# EAGLE board Board_v1_3 (EAGLE 9.6.2)
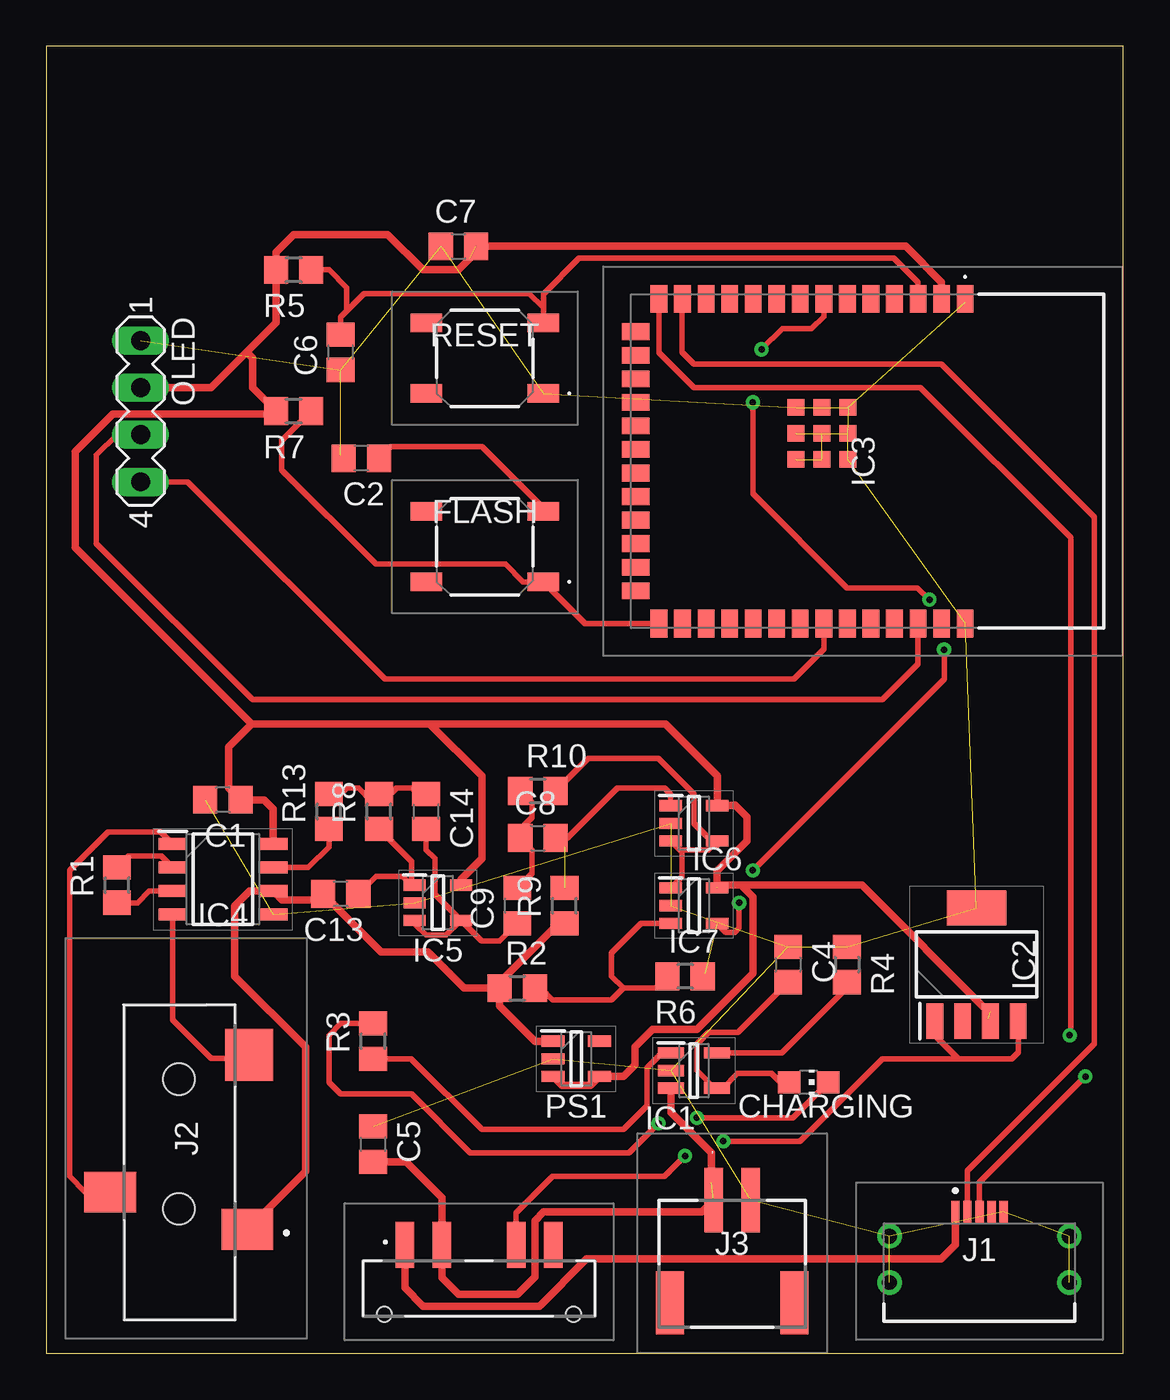
[diagram p0: board, top side]
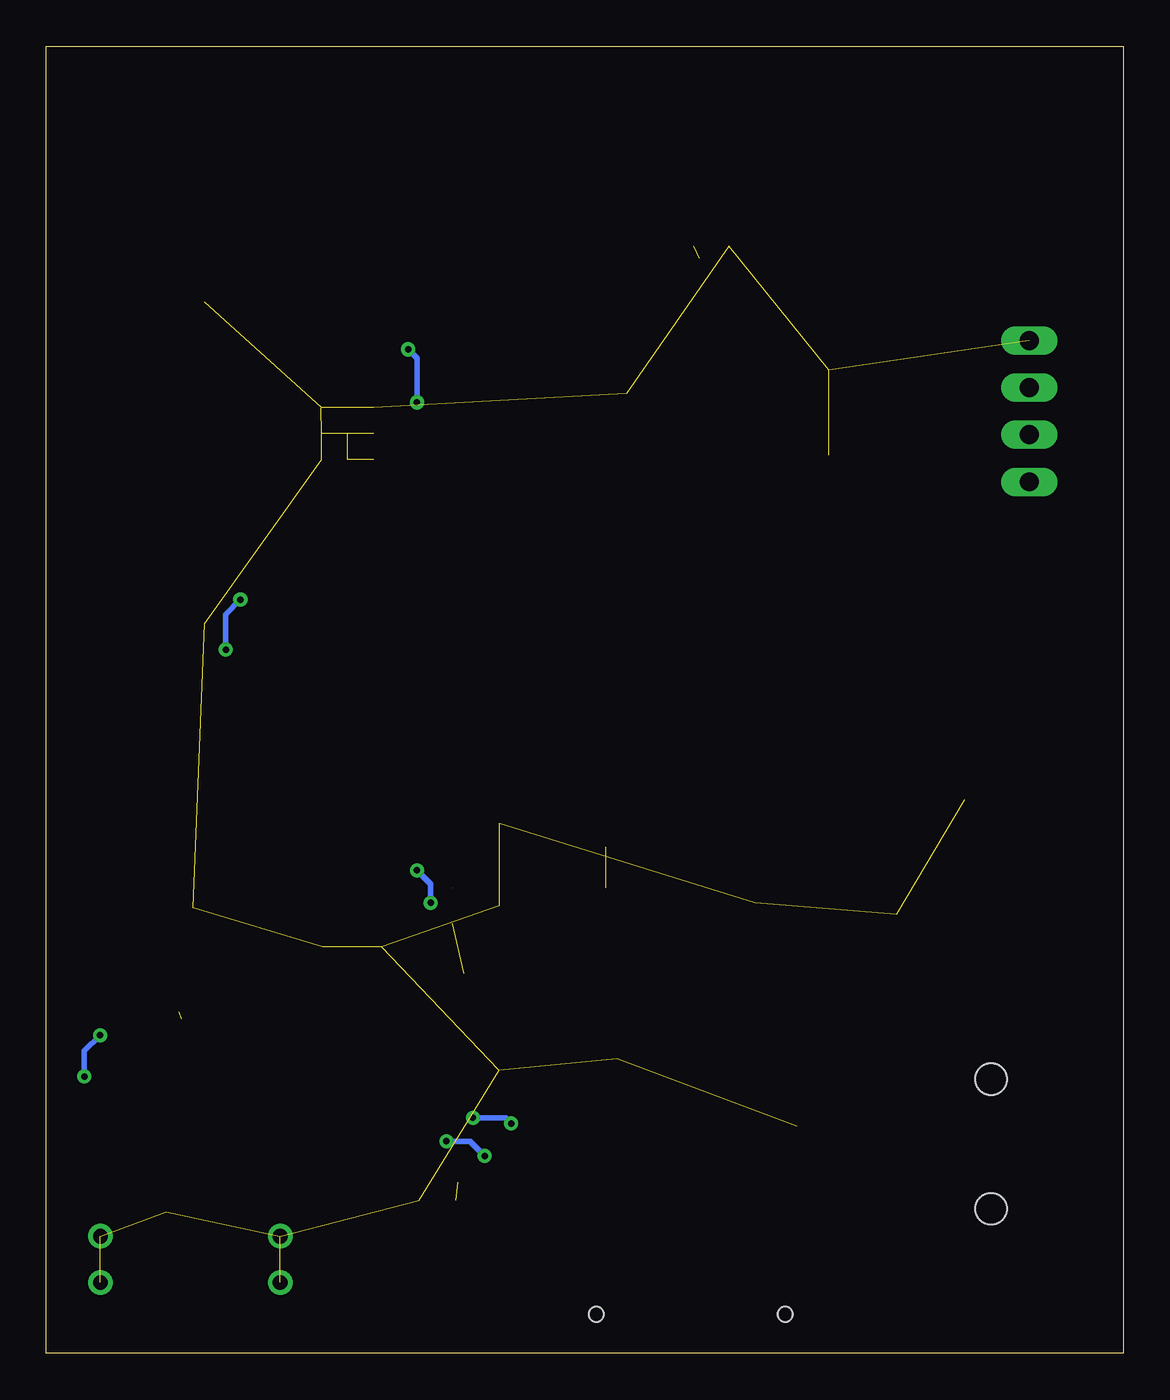
[diagram p1: board, bottom side, seen from below]

Size 58.09 x 70.47 mm. Coordinates in mm from the lower left corner, seen from the top.
Outline: 0,0 58.09,0 58.09,70.47 0,70.47 0,0
Copper layers (1*16): Top 0.035mm / dielectric 1.5mm / Bottom 0.035mm
Design rules "default": minimum track width 6mil, minimum drill 0.35mm, track to track 6mil, track to pad 6mil, pad to pad 6mil, via to via 6mil, smd to smd 6mil, copper to edge 40mil, drill to drill 6mil, minimum pad ring 10mil, minimum via ring 8mil, stop-mask expansion 4mil, vias tented up to drill 0mil, thermal gap 10mil

## Footprints (pad centres in the part's own frame; a part is rotated, then mirrored left to right if it is on the bottom)
C0805 = smd 1.3 x 1.5: 1 -0.95,0; 2 0.95,0
CHIP-LED0805 = smd 1.2 x 1.2: A 0,-1.05; C 0,1.05
TS18517SL160SMTTR = smd 1.7 x 1: 1 -3.15,1.9; 2 3.15,1.9; 3 -3.15,-1.9; 4 3.15,-1.9
SOT95P270X145-5N = smd 1.4 x 0.6: 1 -1.25,0.95; 2 -1.25,0; 3 -1.25,-0.95; 4 1.25,-0.95; 5 1.25,0.95
SOT150P700X180-5N = smd 1.9 x 0.9: 1 -3.05,2.25; 2 -3.05,0.75; 3 -3.05,-0.75; 4 -3.05,-2.25 | smd 1.9 x 3.2: 5 3.05,0
ESP32S3WROOM1N16R8 = smd 1.5 x 0.9: 1 -8.75,5.26; 2 -8.75,3.99; 3 -8.75,2.72; 4 -8.75,1.45; 5 -8.75,0.18; 6 -8.75,-1.09; 7 -8.75,-2.36; 8 -8.75,-3.63; 9 -8.75,-4.9; 10 -8.75,-6.17; 11 -8.75,-7.44; 12 -8.75,-8.71; 13 -8.75,-9.98; 14 -8.75,-11.25; 27 8.75,-11.25; 28 8.75,-9.98; 29 8.75,-8.71; 30 8.75,-7.44; 31 8.75,-6.17; 32 8.75,-4.9; 33 8.75,-3.63; 34 8.75,-2.36; 35 8.75,-1.09; 36 8.75,0.18; 37 8.75,1.45; 38 8.75,2.72; 39 8.75,3.99; 40 8.75,5.26 | smd 0.9 x 1.5: 15 -6.985,-12.5; 16 -5.715,-12.5; 17 -4.445,-12.5; 18 -3.175,-12.5; 19 -1.905,-12.5; 20 -0.635,-12.5; 21 0.635,-12.5; 22 1.905,-12.5; 23 3.175,-12.5; 24 4.445,-12.5; 25 5.715,-12.5; 26 6.985,-12.5 | smd 0.9 x 0.9: 41 -1.5,-2.46; 42 -2.9,-1.06; 43 -2.9,-2.46; 44 -2.9,-3.86; 45 -1.5,-3.86; 46 -0.1,-3.86; 47 -0.1,-2.46; 48 -0.1,-1.06; 49 -1.5,-1.06
SOIC127P600X175-8N = smd 1.525 x 0.65: 1 -2.712,1.905; 2 -2.712,0.635; 3 -2.712,-0.635; 4 -2.712,-1.905; 5 2.712,-1.905; 6 2.712,-0.635; 7 2.712,0.635; 8 2.712,1.905
SOT95P280X145-5N = smd 1.2 x 0.6: 1 -1.25,0.95; 2 -1.25,0; 3 -1.25,-0.95; 4 1.25,-0.95; 5 1.25,0.95
USB350030AKIT = smd 0.45 x 1.2: 1 -1.3,3.8; 2 -0.65,3.8; 3 0,3.8; 4 0.65,3.8; 5 1.3,3.8 | drill 0.8 pad 1.2: MH1 -4.85,2.5; MH2 4.85,2.5; MH3 -4.85,0; MH4 4.85,0
SJ3523SMTTR = smd 2.2 x 2.8: 1 2.4,-3.7; 3 4.4,3.7 | smd 2.8 x 2.6: 2 11.8,-3.8 | hole 1.7: 3.5,0; 10.5,0
1769 = smd 1 x 3.5: 1 -1,0; 2 1,0 | smd 1.5 x 3.4: 3 -3.35,-5.55; 4 3.35,-5.55
MA04-1 = drill 1.016 long: 1 -3.81,0; 2 -1.27,0; 3 1.27,0; 4 3.81,0
SOT95P280X110-5N = smd 1.25 x 0.6: 1 -1.25,0.95; 2 -1.25,0; 3 -1.25,-0.95; 4 1.25,-0.95; 5 1.25,0.95
R0805 = smd 1.3 x 1.5: 1 -0.95,0; 2 0.95,0
SS4CMVTR = smd 1 x 2.5: A1 -4,2.35; B1 -2,2.35; C1 2,2.35; D1 4,2.35 | hole 0.8: -5.1,-1.4; 5.1,-1.4

## Placement (x,y rotation side)
C1  [C0805]  9.53,29.84 180 top
C2  [C0805]  16.99,48.26 180 top
C4  [C0805]  40.01,20.95 270 top
C5  [C0805]  17.62,11.27 270 top
C6  [C0805]  15.88,53.98 90 top
C7  [C0805]  22.23,59.69 0 top
C8  [C0805]  26.51,27.78 0 top
C9  [C0805]  25.4,24.13 90 top
C13  [C0805]  15.88,24.77 180 top
C14  [C0805]  20.48,29.21 270 top
CHARGING  [CHIP-LED0805]  41.12,14.61 270 top
FLASH  TS18-5-17-SL-160-SMT-TR  [TS18517SL160SMTTR]  23.65,43.5 180 top
IC1  MCP73831T-2ACI_OT  [SOT95P270X145-5N]  34.92,15.24 0 top
IC2  LP38692MP-3.3_NOPB  [SOT150P700X180-5N]  50.16,20.95 90 top
IC3  ESP32-S3-WROOM-1-N16R8  [ESP32S3WROOM1N16R8]  44.29,48.1 270 top
IC4  AD8226ARZ  [SOIC127P600X175-8N]  9.53,25.56 0 top
IC5  LMV321IDBVRE4  [SOT95P280X145-5N]  21.11,24.29 0 top
IC6  LMV321IDBVRE4  [SOT95P280X145-5N]  34.92,28.57 0 top
IC7  LMV321IDBVRE4  [SOT95P280X145-5N]  34.92,24.13 0 top
J1  USB3500-30-A-KIT  [USB350030AKIT]  50.32,3.81 0 top
J2  SJ-3523-SMT-TR  [SJ3523SMTTR]  7.14,4.29 90 top
J3  1769  [1769]  36.99,8.26 0 top
OLED  [MA04-1]  5.08,50.8 270 top
PS1  REF2033AIDDCR  [SOT95P280X110-5N]  28.57,15.88 0 top
R1  [R0805]  3.81,25.24 90 top
R2  [R0805]  25.4,19.68 0 top
R3  220  [R0805]  17.62,16.83 90 top
R4  [R0805]  43.18,20.95 270 top
R5  [R0805]  13.34,58.42 180 top
R6  [R0805]  34.45,20.32 180 top
R7  [R0805]  13.34,50.8 180 top
R8  [R0805]  17.94,29.21 90 top
R9  [R0805]  27.94,24.13 90 top
R10  [R0805]  26.51,30.32 0 top
R13  [R0805]  15.24,29.21 90 top
RESET  TS18-5-17-SL-160-SMT-TR  [TS18517SL160SMTTR]  23.65,53.66 180 top
S1  SS4-CM-V-T_R  [SS4CMVTR]  23.34,3.49 0 top

## Library data of the parts
C1 C2 C4-C9 C13 C14 = rcl; SPICEPREFIX: C
CHARGING = led
FLASH RESET = TS18-5-17-SL-160-SMT-TR; DESCRIPTION: 5 x 5 mm, 1.7 mm Actuator Height, 160 gf, Silver, Surface Mount, TR, SPST, Tactile Switch; HEIGHT: 1.8mm; MANUFACTURER_NAME: Same Sky; MANUFACTURER_PART_NUMBER: TS18-5-17-SL-160-SMT-TR; MOUSER_PART_NUMBER: 179-TS18517SL160SMTT; MOUSER_PRICE-STOCK: https://www.mouser.co.uk/ProductDetail/CUI-Devices/TS18-5-17-SL-160-SMT-TR?qs=tlsG%2FOw5FFhWy38y3t272A%3D%3D
IC1 = MCP73831T-2ACI_OT; ARROW_PART_NUMBER: MCP73831T-2ACI/OT; ARROW_PRICE-STOCK: https://www.arrow.com/en/products/mcp73831t-2aciot/microchip-technology?utm_currency=USD&region=nac; DESCRIPTION: Li-Ion Charge Controller 4.2V SOT23-5; HEIGHT: 1.45mm; MANUFACTURER_NAME: Microchip; MANUFACTURER_PART_NUMBER: MCP73831T-2ACI/OT; MOUSER_PART_NUMBER: 579-MCP73831T-2ACIOT; MOUSER_PRICE-STOCK: https://www.mouser.co.uk/ProductDetail/Microchip-Technology/MCP73831T-2ACI-OT?qs=yUQqVecv4qvbBQBGbHx0Mw%3D%3D
IC2 = LP38692MP-3.3_NOPB; DESCRIPTION: LP38692MP-3.3/NOPB, Low Dropout Voltage Regulator, 1A, 3.3 V +/-2.5%, 2.7 10 Vin, 5-Pin SOT-223; HEIGHT: 1.8mm; MANUFACTURER_NAME: Texas Instruments; MANUFACTURER_PART_NUMBER: LP38692MP-3.3/NOPB; MOUSER_PART_NUMBER: 926-LP38692MP3.3NOPB; MOUSER_PRICE-STOCK: https://www.mouser.co.uk/ProductDetail/Texas-Instruments/LP38692MP-3.3-NOPB?qs=1FNqv8aZn1TpKuOP2NKBdg%3D%3D
IC3 = ESP32-S3-WROOM-1-N16R8; DESCRIPTION: Multiprotocol Modules SMD Module, ESP32-S3R8, 3.3V, 8 MB Octal PSRAM Die, 16 MB Quad SPI Flash, PCB Antenna; HEIGHT: 3.25mm; MANUFACTURER_NAME: Espressif Systems; MANUFACTURER_PART_NUMBER: ESP32-S3-WROOM-1-N16R8; MOUSER_PART_NUMBER: 356-ESP32S3WRM1N16R8; MOUSER_PRICE-STOCK: https://www.mouser.co.uk/ProductDetail/Espressif-Systems/ESP32-S3-WROOM-1-N16R8?qs=Li%252BoUPsLEnvQc9gW6AMhZg%3D%3D
IC4 = AD8226ARZ; DESCRIPTION: Wide Supply Range, Rail-to-Rail Output Instrumentation Amplifier; HEIGHT: 1.75mm; MANUFACTURER_NAME: Analog Devices; MANUFACTURER_PART_NUMBER: AD8226ARZ; MOUSER_PART_NUMBER: 584-AD8226ARZ; MOUSER_PRICE-STOCK: https://www.mouser.co.uk/ProductDetail/Analog-Devices/AD8226ARZ?qs=%2FtpEQrCGXCzihJADRPlhCg%3D%3D
IC5-IC7 = LMV321IDBVRE4; DESCRIPTION: OP Amp Single GP R-R O/P 5.5V 5-Pin SOT-23 T/R; HEIGHT: 1.45mm; MANUFACTURER_NAME: Texas Instruments; MANUFACTURER_PART_NUMBER: LMV321IDBVRE4; MOUSER_PART_NUMBER: 595-LMV321IDBVRE4; MOUSER_PRICE-STOCK: https://www.mouser.co.uk/ProductDetail/Texas-Instruments/LMV321IDBVRE4?qs=yhNIDeTE%252BcaI6cu5FHph6A%3D%3D
J1 = USB3500-30-A-KIT; DESCRIPTION: USB Connectors Micro B Skt, Mid Mount-SMT, R/A, 30u", With Peg, T&R, IP67 + USBTJ-02 Gasket; HEIGHT: 2.8mm; MANUFACTURER_NAME: GCT (GLOBAL CONNECTOR TECHNOLOGY); MANUFACTURER_PART_NUMBER: USB3500-30-A-KIT; MOUSER_PART_NUMBER: 640-USB3500-30-A-KIT; MOUSER_PRICE-STOCK: https://www.mouser.co.uk/ProductDetail/GCT/USB3500-30-A-KIT?qs=KUoIvG%2F9IlZmD2kH2DfgYg%3D%3D
J2 = SJ-3523-SMT-TR; DESCRIPTION: 3.5 mm, Stereo, Right Angle, Surface Mount (SMT), 3 Conductors, 0 Internal Switches, Audio Jack Connector; HEIGHT: 5.2mm; MANUFACTURER_NAME: Same Sky; MANUFACTURER_PART_NUMBER: SJ-3523-SMT-TR; MOUSER_PART_NUMBER: 490-SJ-3523-SMT-TR; MOUSER_PRICE-STOCK: https://www.mouser.co.uk/ProductDetail/CUI-Devices/SJ-3523-SMT-TR?qs=WyjlAZoYn51zOHzJ3r4ZRA%3D%3D
J3 = 1769; ARROW_PART_NUMBER: 1769; ARROW_PRICE-STOCK: https://www.arrow.com/en/products/1769/adafruit-industries?utm_currency=USD&region=nac; DESCRIPTION: Adafruit Accessories JST-PH 2-pin SMT Right Angle Connect; HEIGHT: 5.5mm; MANUFACTURER_NAME: Adafruit; MANUFACTURER_PART_NUMBER: 1769; MOUSER_PART_NUMBER: 485-1769; MOUSER_PRICE-STOCK: https://www.mouser.co.uk/ProductDetail/Adafruit/1769?qs=GURawfaeGuBbgoGtf2XstA%3D%3D
OLED = con-lstb; OC_FARNELL: unknown; OC_NEWARK: unknown
PS1 = REF2033AIDDCR; DESCRIPTION: Low-Drift, Low-Power, Dual-Output Vref and Vref/2 Voltage Reference; HEIGHT: 1.1mm; MANUFACTURER_NAME: Texas Instruments; MANUFACTURER_PART_NUMBER: REF2033AIDDCR; MOUSER_PART_NUMBER: 595-REF2033AIDDCR; MOUSER_PRICE-STOCK: https://www.mouser.co.uk/ProductDetail/Texas-Instruments/REF2033AIDDCR?qs=7z%252BmIopC6%2FKHHOBVNaL7UQ%3D%3D
R1-R10 R13 = rcl; SPICEPREFIX: R
S1 = SS4-CM-V-T_R; DESCRIPTION: Slide Switches Slide Type 1P3T (2.0mm height); HEIGHT: 2mm; MANUFACTURER_NAME: Diptronics; MANUFACTURER_PART_NUMBER: SS4-CM-V-T/R; MOUSER_PART_NUMBER: 113-SS4CMVTR; MOUSER_PRICE-STOCK: https://www.mouser.co.uk/ProductDetail/Diptronics/SS4-CM-V-T-R?qs=MLItCLRbWswqNEU%2F6grMKg%3D%3D

## Nets
+3V3: C1.1 C7.2 IC2.3 IC3.2 IC4.8 IC5.5 IC6.5 IC7.5 OLED.2 PS1.3 PS1.4 R5.2 R7.2
+5V: J1.1 S1.A1
+BATT: C5.2 IC1.3 J3.1 S1.B1
+D: IC3.14 J1.3
-D: IC3.13 J1.2
DAC1: IC3.10
DAC2: IC3.11
GND: C1.2 C2.2 C4.1 C5.1 C6.1 C7.1 IC1.2 IC2.5 IC3.1 IC3.40 IC3.41 IC3.42 IC3.43 IC3.44 IC3.45 IC3.46 IC3.47 IC3.48 IC3.49 IC4.5 IC5.2 IC6.2 IC7.2 J1.5 J1.MH1 J1.MH2 J1.MH3 J1.MH4 J3.2 OLED.1 PS1.2 R4.1 RESET.1
IRQ_RA02: IC3.9
LED1: IC3.23
LED2: IC3.22
LED3: IC3.21
MISO: IC3.32
MOSI: IC3.39
N$1: IC4.2 R1.2
N$2: IC4.3 R1.1
N$3: IC4.1 J2.3
N$4: IC4.4 J2.2
N$5: C8.2 IC6.1 R9.2
N$6: IC1.1 R3.1
N$7: IC1.5 R4.2
N$8: CHARGING.C R3.2
N$9: C8.1 C9.2 R10.1
N$10: FLASH.1 IC3.27 R7.1
N$11: C13.1 IC5.1 R8.1
N$12: C2.1 FLASH.3
N$13: IC2.1 IC2.4 S1.C1
N$14: IC7.3 R2.2 R6.2
N$15: C4.2 CHARGING.A IC1.4
N$17: C14.1 R8.2 R13.2
NSS: IC3.30
RESET32: C6.2 IC3.3 R5.1 RESET.3
RST-RA: IC3.28
RX: IC3.36
SCK: IC3.31
SCL: IC3.38 OLED.3
SDA: IC3.34 OLED.4
TOUCHPAD1: IC3.17
TOUCHPAD2: IC3.18
TOUCHPAD3: IC3.19
TX: IC3.37
VOUT1: IC4.7 R13.1
VOUT2: C9.1 C14.2 IC5.3 IC5.4
VOUT3: IC6.3 IC6.4 IC7.1 R10.2
VOUT4: IC3.7 IC7.4 R6.1
VSS: C13.2 IC4.6 J2.1 PS1.1 R2.1 R9.1

## Tracks (layer width: path | path; a pad name or v marks a point on that pad's centre or on a via)
+3V3  (3 unrouted)
  Top 0.305: IC4.8 12.24,27.48
  Top 0.406: IC2.3 50.8,18.02 | 36.2,29.5 IC6.5 36.2,29.55 | 20.68,33.93 33.38,33.93 36.2,31.11 36.2,29.55 | IC7.5 36.2,25.1 | 36.2,29.55 37.13,29.55 37.15,29.56 37.78,28.93 37.78,27.62 36.17,26.02 IC7.5 | OLED.2 8.89,52.07 10.79,53.98 | IC3.2 48.28,57.76 46.35,59.69 C7.2 | 11.07,33.93 1.56,43.45 1.56,48.63 3.57,50.65 12.23,50.65 R7.2 11.12,52.07 11.12,53.66 10.79,53.98 | IC5.5 22.36,25.54 23.5,26.67 23.5,31.11 20.68,33.93 | 10.79,53.98 12.38,55.56 R5.2 12.38,59.38 13.34,60.33 18.41,60.33 20.32,58.42 22.23,58.42 22.86,59.05 | 50.81,18.41 50.91,18.41 | 50.81,18.41 50.8,18.41 | 35.88,25.08 36.2,25.08 | IC7.5 36.2,25.06 36.38,25.24 37.47,25.24 | IC4.8 12.24,29.36 11.75,29.84 C1.1 9.84,30.48 9.84,32.7 11.07,33.93 | 20.68,33.93 11.07,33.93 | 50.81,18.41 43.98,25.24 37.47,25.24 | 37.47,25.24 38.1,24.61 38.1,20.48 35.08,17.46 32.7,17.46 31.75,16.51 31.75,15.56 31.11,14.93 PS1.4 29.35,14.45 27.8,14.45 PS1.3
+5V
  Top 0.406: S1.A1 19.34,3.52 20.32,2.54 26.59,2.54 29.13,5.08 48.26,5.08 49.02,5.84 J1.1
+BATT  (1 unrouted)
  Top 0.305: 21.5,6.03 21.34,6.19 | 21.27,5.78 S1.B1
  Top 0.406: S1.B1 21.34,6.19 | S1.B1 21.34,8.38 19.4,10.32 C5.2 | IC1.3 33.67,13 35.88,10.79 35.88,9.21 | S1.B1 21.34,4.06 22.23,3.17 25.4,3.17 26.35,4.13 26.35,7.14 26.83,7.62 35.35,7.62 J3.1
+D  (via drill 0.35)
  Top 0.305: IC3.14 33.04,53.95 34.92,52.07 47.15,52.07 55.24,43.97 55.24,17.19 v55.2,17.14 | J1.3 50.32,9.21 v56.04,14.92
  Bottom 0.305: v56.04,14.92 56.04,16.3 v55.2,17.14
-D
  Top 0.305: IC3.13 34.29,56.83 34.29,53.98 34.92,53.34 48.26,53.34 56.52,45.09 56.52,16.67 49.67,9.83 J1.2
GND  (32 unrouted)
  Top 0.305: IC3.1 49.55,56.67 | 43.27,50.96 IC3.42
  Top 0.406: RESET.1 | 15.88,48.42 C2.2
N$1
  Top 0.305: IC4.2 6.18,26.83 4.45,26.83 R1.2
N$2
  Top 0.305: R1.1 4.92,24.29 5.56,24.92 IC4.3
N$3
  Top 0.305: IC4.1 6.18,28.1 3.33,28.1 1.27,26.04 1.27,9.53 2.11,8.69 J2.3
N$4
  Top 0.305: IC4.4 6.81,17.97 8.9,15.88 10.74,15.88 J2.2
N$5  (1 unrouted)
  Top 0.305: 27.94,27.3 C8.2 28.1,27.78 30.8,30.48 33.34,30.48 33.66,30.15 33.66,29.54 | IC6.1 33.66,29.54 | 33.66,29.54 33.66,29.55
N$6
  Top 0.305: R3.1 19.68,15.88 23.5,12.06 31.11,12.06 32.38,13.34 32.38,15.38 33.19,16.19 IC1.1
N$7
  Top 0.305: IC1.5 39.69,16.19 43.18,19.68 R4.2
N$8  (via drill 0.35)
  Top 0.305: v33.02,12.38 31.43,10.79 22.86,10.79 19.68,13.97 15.88,13.97 15.24,14.61 15.24,17.14 15.87,17.78 R3.2 | CHARGING.C 40.26,12.7 v35.08,12.7
  Bottom 0.305: v33.02,12.38 33.34,12.7 v35.08,12.7
N$9
  Top 0.305: 25.56,25.24 C9.2 26.19,25.87 26.19,27.15 C8.1 25.56,28.26 26.19,28.89 26.19,29.69 R10.1
N$10
  Top 0.305: IC3.27 29.03,39.35 29.03,39.38 FLASH.1 25.71,41.6 24.77,42.55 17.78,42.55 12.7,47.62 12.7,49.22 R7.1
N$11
  Top 0.305: IC5.1 19.68,25.24 | R8.1 19.68,26.51 19.68,25.24 | C13.1 17.78,25.72 19.21,25.72 19.68,25.24
N$12
  Top 0.305: FLASH.3 26.8,45.59 23.5,48.9 18.57,48.9 C2.1
N$13  (via drill 0.35)
  Top 0.305: IC2.1 47.91,17.14 49.19,15.88 | S1.C1 25.34,7.56 27.3,9.53 33.34,9.53 v34.45,10.64 | v36.51,11.43 40.64,11.43 45.09,15.88 49.19,15.88 | 49.19,15.88 52.07,15.88 52.41,16.22 IC2.4
  Bottom 0.305: v34.45,10.64 35.24,11.43 v36.51,11.43
N$14
  Top 0.305: IC7.3 32.07,23.18 30.48,21.59 30.48,20.32 31.11,19.68 | R2.2 26.67,19.68 27.3,19.05 30.48,19.05 31.11,19.68 | 31.11,19.68 32.86,19.68 R6.2
N$15
  Top 0.305: CHARGING.A 39.59,14.61 39.11,15.08 37.28,15.08 36.49,14.29 IC1.4 36.03,14.29 35.08,15.24 35.08,16.67 35.72,17.3 37.3,17.3 C4.2
N$17
  Top 0.305: R13.2 15.87,30.16 16.19,30.48 16.83,30.48 17.54,29.76 R8.2 18.57,30.16 18.89,30.48 19.68,30.48 20,30.16 C14.1
RESET32
  Top 0.305: C6.2 15.88,55.88 16.19,56.2 | IC3.3 47.01,57.76 45.72,59.05 28.73,59.05 26.8,57.12 RESET.3 26.8,56.38 26.04,57.15 17.14,57.15 16.19,56.2 | R5.1 15.24,58.42 16.19,57.47 16.19,56.2
  Top 0.406: R5.1 13.97,58.73
SCL
  Top 0.305: OLED.3 3.81,49.53 2.7,48.42 2.7,43.66 11.11,35.24 45.09,35.24 47.01,37.17 IC3.38
SDA
  Top 0.305: OLED.4 7.62,46.99 18.26,36.35 40.32,36.35 41.93,37.96 IC3.34
VOUT1
  Top 0.305: IC4.7 14.13,26.19 15.24,27.3 R13.1
VOUT2
  Top 0.305: C9.1 24.45,22.23 23.48,22.23 IC5.4 | IC5.4 20.95,24.75 20.95,26.67 20.48,27.15 C14.2 | IC5.3 19.86,23.16 20.48,22.54 21.57,22.54 IC5.4
  Top 0.406: C14.2 20.64,28.1 | 25.4,22.86 C9.1
VOUT3
  Top 0.305: R10.2 29.21,32.07 33.02,32.07 34.92,30.16 34.92,28.57 35.88,27.62 IC6.4 35.7,27.15 34.15,27.15 IC6.3 34.29,27.01 34.29,25.7 IC7.1
  Top 0.406: 36.17,27.44 IC6.4
VOUT4  (via drill 0.35)  (1 unrouted)
  Top 0.203: R6.1 35.56,20.48 | 42.07,56.71 IC3.7
  Top 0.305: v48.42,37.94 48.42,36.35 v38.1,26.04 | v47.62,40.64 46.99,41.27 43.18,41.27 38.1,46.35 v38.1,51.28 | v38.58,54.13 39.69,55.24 41.27,55.24 41.93,55.9 IC3.7 | IC7.4 36.65,22.7 37.15,22.7 37.37,22.92 v37.37,24.29
  Top 0.406: R6.1 35.38,20.34 | 36.19,23.16 IC7.4
  Bottom 0.305: v38.1,26.04 37.37,25.3 v37.37,24.29 | v47.62,40.64 48.42,39.85 v48.42,37.94 | v38.1,51.28 38.1,53.66 v38.58,54.13
VSS
  Top 0.305: IC4.6 12.24,24.75
  Top 0.406: R9.1 27.62,23.18 24.45,20 R2.1 | PS1.1 26.36,16.82 24.45,18.73 R2.1 | J2.1 13.97,9.81 13.97,16.51 10.16,20.32 10.16,24.13 10.95,24.92 IC4.6 12.71,24.45 14.61,24.45 C13.2 15.82,23.87 18.05,21.64 20.58,21.64 22.54,19.68 R2.1